# EAGLE board PCB panel M1 (2016-04-06) (EAGLE 6.1), part 1 of 5
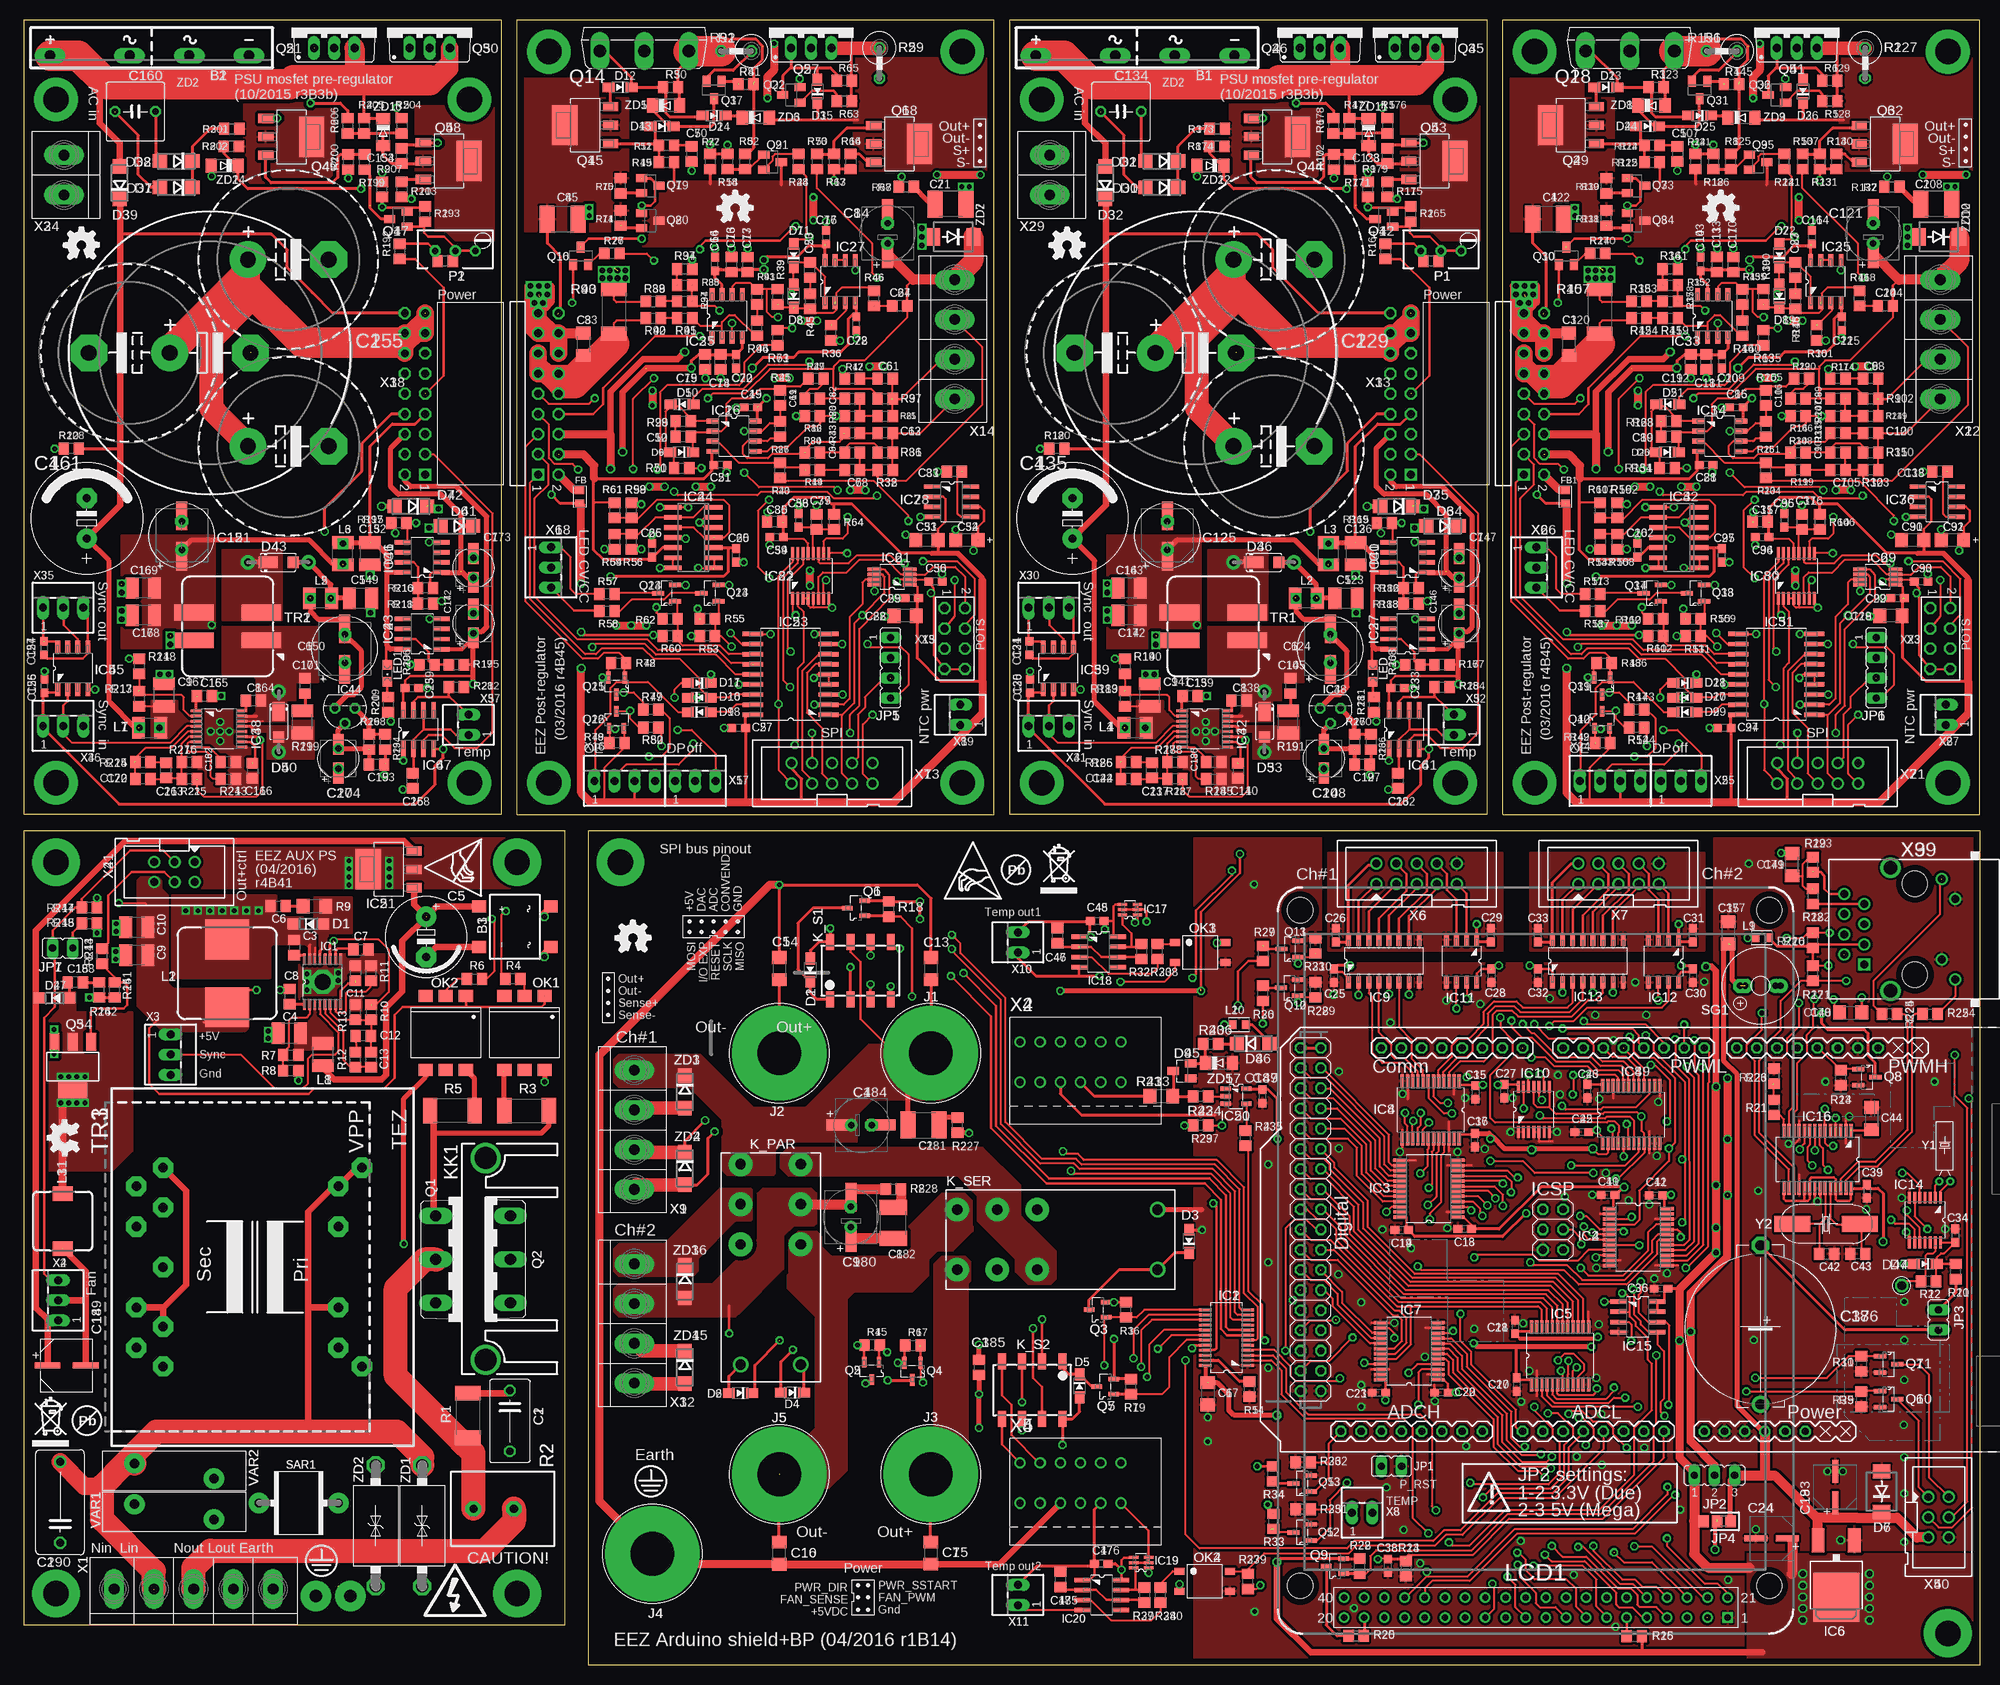
[diagram p0: board, top side]
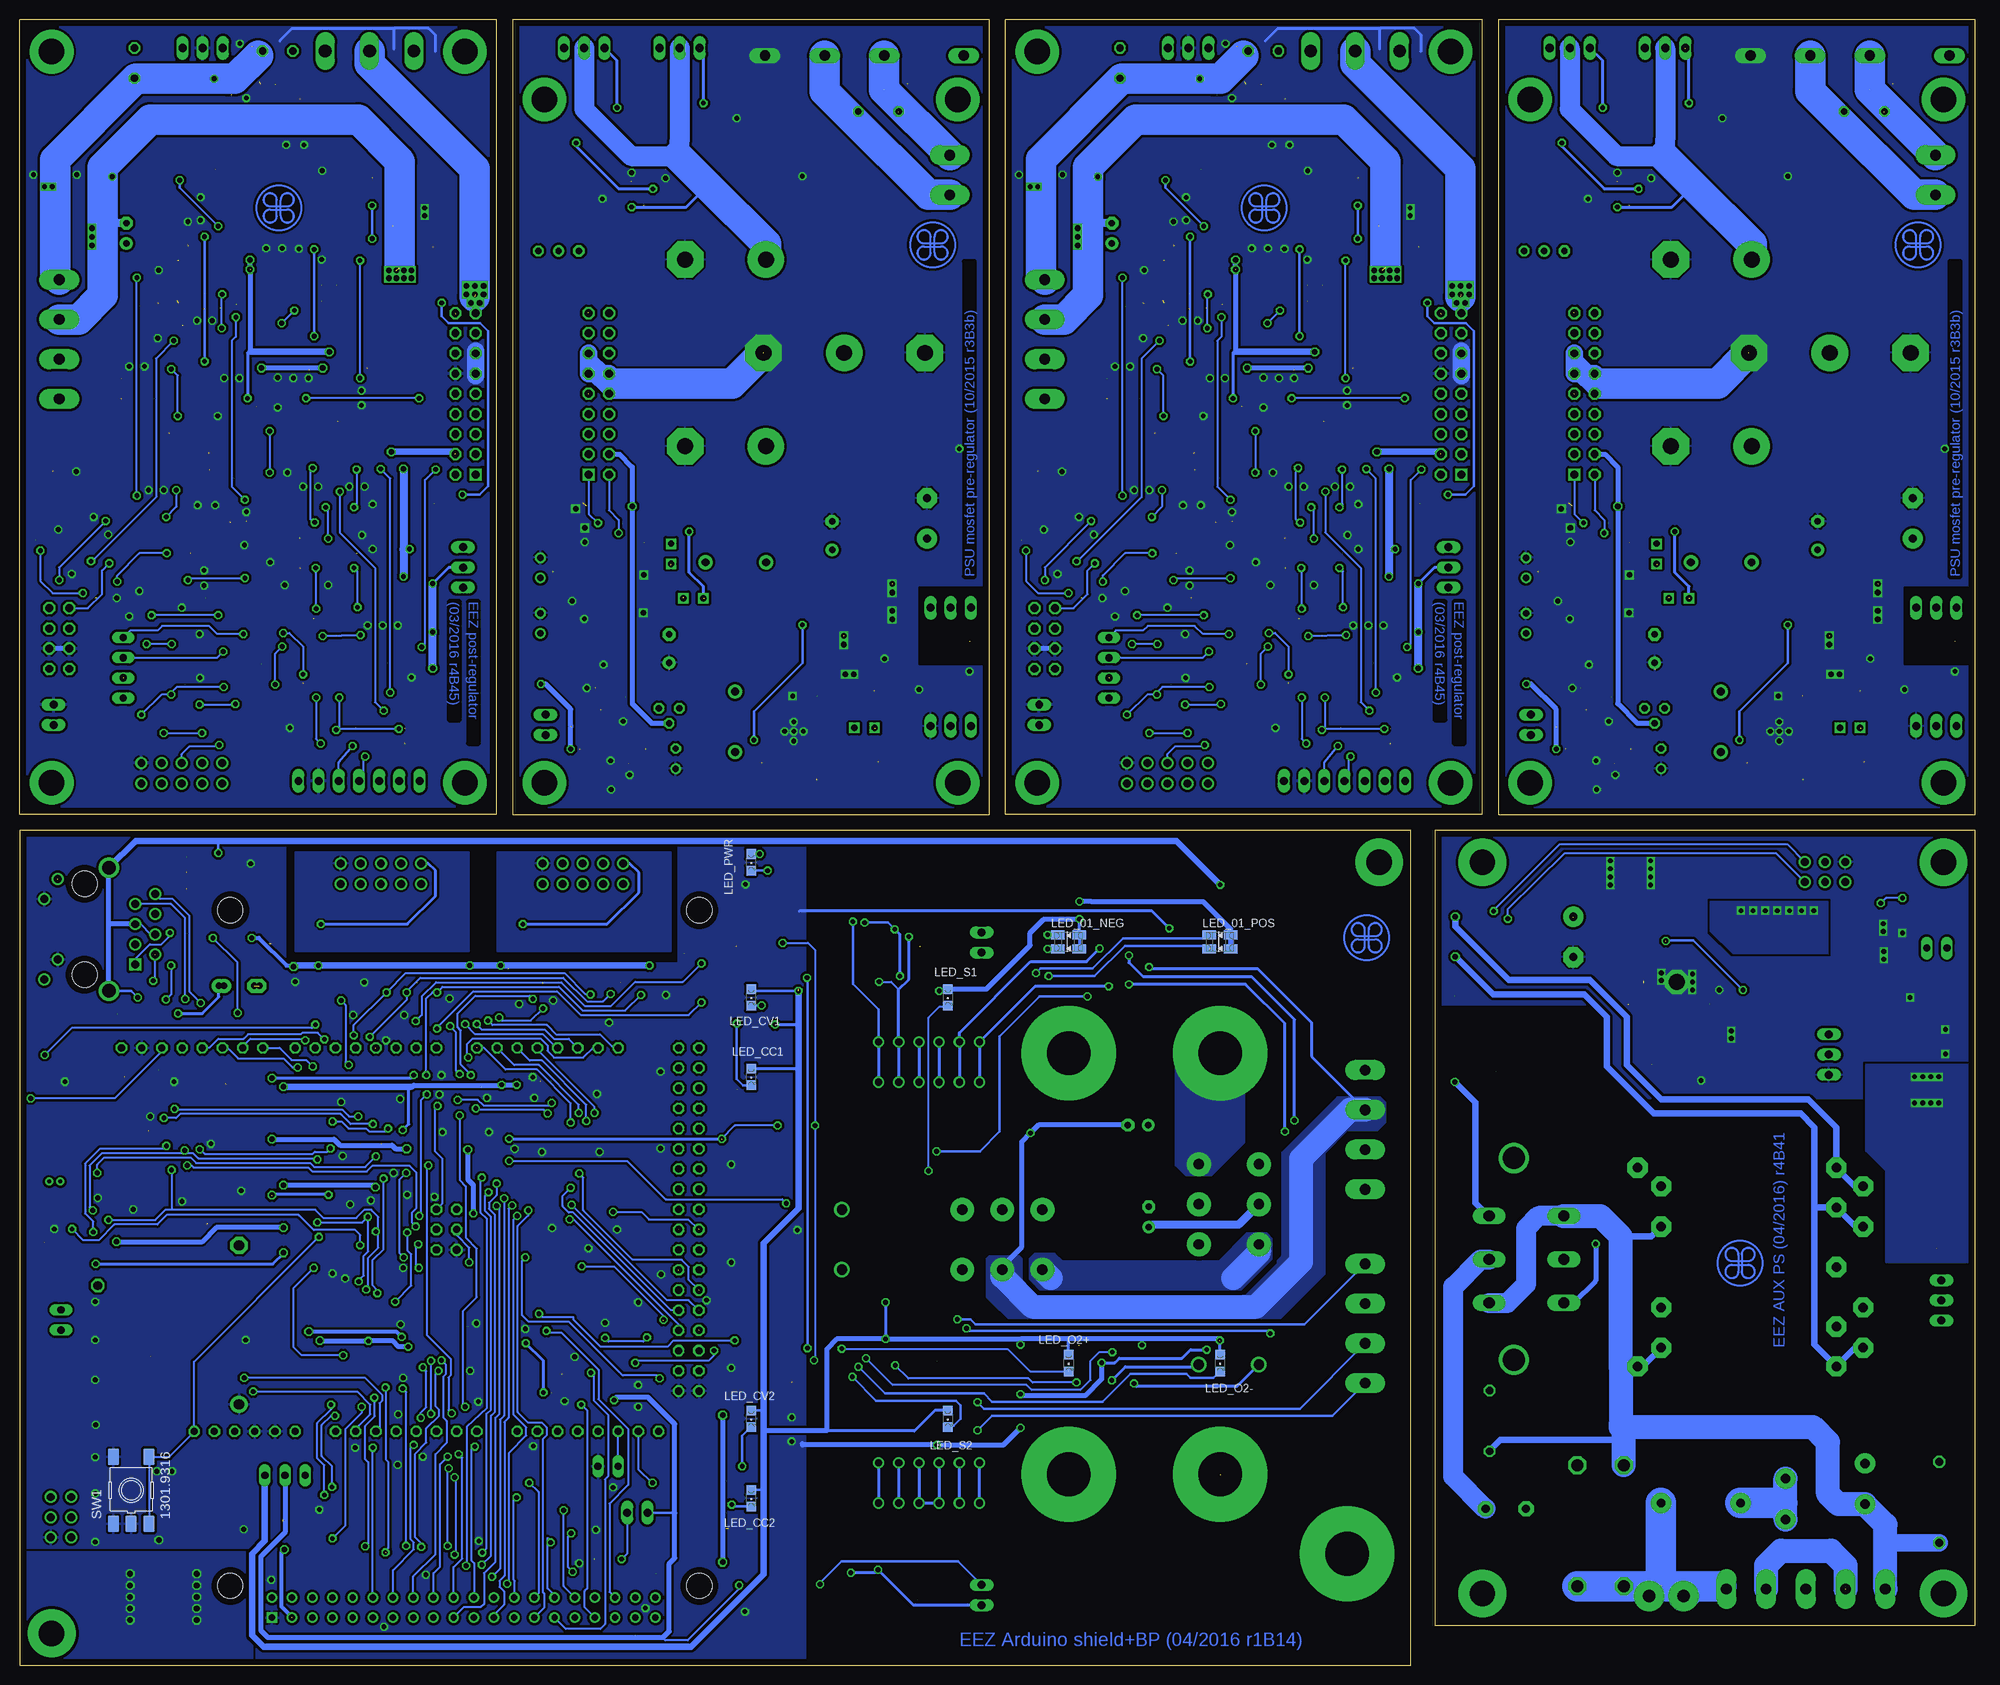
[diagram p1: board, bottom side, seen from below]

Size 246 x 207 mm. Coordinates in mm from the lower left corner, seen from the top.
Outline: 124,207 184,207 184,107 124,107 124,207
Outline: 0,207 60,207 60,107 0,107 0,207
Outline: 122,107 122,207 62,207 62,107 122,107
Outline: 246,107 246,207 186,207 186,107 246,107
Outline: 71,0 71,105 246,105 246,0 71,0
Outline: 0,5 0,105 68,105 68,5 0,5
Copper layers (1+5*16): Top 0.035mm / dielectric 0.75mm / Route5 0.035mm / dielectric 0.75mm / Bottom 0.035mm
Design rules: minimum track width 10mil, minimum drill 0.5mm, track to track 8mil, track to pad 8mil, pad to pad 8mil, via to via 8mil, smd to smd 8mil, copper to edge 30mil, drill to drill 8mil, minimum pad ring 10mil, minimum via ring 8mil, stop-mask expansion 0mil, vias tented up to drill 25mil, thermal gap 10mil
Net classes: 0 default: width 0.254 mm, drill 0.584 mm, clearance 0.254 mm; 1 power: width 0.254 mm, drill 0.584 mm, clearance 0.254 mm; 2 gnd: width 0.254 mm, drill 0.584 mm, clearance 0.254 mm; 3 isolators: width 0.254 mm, drill 0.584 mm, clearance 0.254 mm
tKeepout: 8 lines

## Footprints (pad centres in the part's own frame; a part is rotated, then mirrored left to right if it is on the bottom)
GBI20 = drill 1.3 long: + -12.75,-3.5; - 12.25,-3.5; AC1 -2.75,-3.5; AC2 4.75,-3.5
DFS = smd 1.5 x 1.7: + -2.55,-4.5; - 2.55,-4.5; AC1 -2.55,4.5; AC2 2.55,4.5
C0805 = smd 1.3 x 1.5: 1 -0.95,0; 2 0.95,0
C075-052X106 = drill 0.914 octagon: 1 -3.81,0; 2 3.81,0
C1210 = smd 1.6 x 2.7: 1 -1.4,0; 2 1.4,0
ECAP5/10.5 = drill 1.016 pad 2.54: + -2.54,0 | drill 1.016 pad 2.54 octagon: - 2.54,0
C1206 = smd 1.6 x 1.8: 1 -1.4,0; 2 1.4,0
C0603 = smd 1.1 x 1: 1 -0.85,0; 2 0.85,0
PANASONIC_C = smd 2.87 x 0.762: 1 -1.981,0; 2 1.981,0
EC1206 = smd 1.6 x 1.8: + -1.4,0; - 1.4,0
C1812 = smd 1.9 x 3.4: 1 -1.95,0; 2 1.95,0
CAPAE660X610N_COMBO2 = smd 3.6 x 1.4: 1 -2.6,0; 2 2.5,0 | drill 0.813 pad 1.6: 1.1 -1.27,0 | drill 0.813 pad 1.6 octagon: 2.1 1.27,0
CAPAE660X610N_COMBO = smd 3.6 x 1.4: 1 -2.6,0; 2 2.5,0 | drill 0.813 pad 1.6: 1.1 -1.778,0 | drill 0.813 pad 1.6 octagon: 2.1 1.778,0
ED35D+3XED22.5_COMBO = drill 2.007 pad 4.597: + -5.08,0; +2 4.763,11.748; +3 4.763,-11.748 | drill 2.007 pad 4.597 octagon: - 5.08,0; -1 -15.24,0; -2 14.922,11.748; -3 14.922,-11.748
C050-075X075 = drill 0.813 octagon: 1 -2.54,0; 2 2.54,0
ECAP5/13 = drill 1.016 pad 2.54: + -2.54,0 | drill 1.016 pad 2.54 octagon: - 2.54,0
CAPAE430X610N_COMBO = smd 2.6 x 1.3: 1 -1.8,0; 2 1.8,0 | drill 0.8: 1.1 -1.27,0 | drill 0.8 octagon: 2.1 1.27,0
SG-R20MM = drill 1.3 pad 2.184 octagon: 1 10.389,0 | drill 1.3 pad 2.184: 2 -9.601,0
CAPAE660X610N = smd 3.251 x 0.762: 1 -2.413,0; 2 2.413,0
C102-064X133 = drill 1.016 octagon: 1 -5.08,0; 2 5.08,0
SOD123 = smd 1.4 x 1.4: A 1.9,0; C -1.9,0
SOD323-W = smd 1.5 x 1.2: A 1.45,0; C -1.45,0
DO214AA = smd 1.8 x 2.2: A 2.55,0; C -2.55,0
DO214AC = smd 1.8 x 1.7: A 2.05,0; C -2.05,0
DO34+SOD123 = drill 1 pad 1.778: A 3.81,0; C -3.81,0 | smd 1.4 x 1.4: A.1 1.9,0 | smd 2.4 x 1.5: C.1 -1.27,0
SOT23 = smd 1 x 1.4: 1 -0.95,-1.1; 2 0.95,-1.1; 3 0,1.1
BEAD0603 = smd 1 x 1.1: P$1 -0.85,0; P$2 0.85,0
SOP65P640X110-17N_HOLE = smd 1.422 x 0.356: 1 -2.845,2.286; 2 -2.845,1.626; 3 -2.845,0.965; 4 -2.845,0.33; 5 -2.845,-0.33; 6 -2.845,-0.965; 7 -2.845,-1.626; 8 -2.845,-2.286; 9 2.845,-2.286; 10 2.845,-1.626; 11 2.845,-0.965; 12 2.845,-0.33; 13 2.845,0.33; 14 2.845,0.965; 15 2.845,1.626; 16 2.845,2.286 | smd 2.032 x 2.032: TP 0,0 | drill 2 octagon: TP2 0,0
SOP63P600X175-24N = smd 1.6 x 0.356: 1 -2.667,3.505; 2 -2.667,2.845; 3 -2.667,2.235; 4 -2.667,1.575; 5 -2.667,0.965; 6 -2.667,0.305; 7 -2.667,-0.305; 8 -2.667,-0.965; 9 -2.667,-1.575; 10 -2.667,-2.235; 11 -2.667,-2.845; 12 -2.667,-3.505; 13 2.667,-3.505; 14 2.667,-2.845; 15 2.667,-2.235; 16 2.667,-1.575; 17 2.667,-0.965; 18 2.667,-0.305; 19 2.667,0.305; 20 2.667,0.965; 21 2.667,1.575; 22 2.667,2.235; 23 2.667,2.845; 24 2.667,3.505
SOP65P780X200-24N = smd 1.651 x 0.432: 1 -3.632,3.581; 2 -3.632,2.921; 3 -3.632,2.286; 4 -3.632,1.626; 5 -3.632,0.965; 6 -3.632,0.33; 7 -3.632,-0.33; 8 -3.632,-0.965; 9 -3.632,-1.626; 10 -3.632,-2.286; 11 -3.632,-2.921; 12 -3.632,-3.581; 13 3.632,-3.581; 14 3.632,-2.921; 15 3.632,-2.286; 16 3.632,-1.626; 17 3.632,-0.965; 18 3.632,-0.33; 19 3.632,0.33; 20 3.632,0.965; 21 3.632,1.626; 22 3.632,2.286; 23 3.632,2.921; 24 3.632,3.581
DPACK = smd 1.6 x 3: 1 -2.28,-4.8; 3 2.28,-4.8 | smd 5.8 x 6.2: 4 0,2.38
SOIC-16 = smd 1.549 x 0.61: 1 -2.692,4.445; 2 -2.692,3.175; 3 -2.692,1.905; 4 -2.692,0.635; 5 -2.692,-0.635; 6 -2.692,-1.905; 7 -2.692,-3.175; 8 -2.692,-4.445; 9 2.692,-4.445; 10 2.692,-3.175; 11 2.692,-1.905; 12 2.692,-0.635; 13 2.692,0.635; 14 2.692,1.905; 15 2.692,3.175; 16 2.692,4.445
SOP65P640X120-14N = smd 1.473 x 0.356: 1 -2.819,1.956; 2 -2.819,1.295; 3 -2.819,0.66; 4 -2.819,0; 5 -2.819,-0.66; 6 -2.819,-1.295; 7 -2.819,-1.956; 8 2.819,-1.956; 9 2.819,-1.295; 10 2.819,-0.66; 11 2.819,0; 12 2.819,0.66; 13 2.819,1.295; 14 2.819,1.956
SOIC127P600X173-8N = smd 1.55 x 0.6: 1 -2.7,1.9; 2 -2.7,0.63; 3 -2.7,-0.64; 4 -2.7,-1.91; 5 2.7,-1.91; 6 2.7,-0.64; 7 2.7,0.63; 8 2.7,1.9
SOIC127P600X175-8N = smd 1.981 x 0.559: 1 -2.464,1.905; 2 -2.464,0.635; 3 -2.464,-0.635; 4 -2.464,-1.905; 5 2.464,-1.905; 6 2.464,-0.635; 7 2.464,0.635; 8 2.464,1.905
SOP65P780X200-28N = smd 1.651 x 0.432: 1 -3.632,4.216; 2 -3.632,3.581; 3 -3.632,2.921; 4 -3.632,2.286; 5 -3.632,1.626; 6 -3.632,0.965; 7 -3.632,0.33; 8 -3.632,-0.33; 9 -3.632,-0.965; 10 -3.632,-1.626; 11 -3.632,-2.286; 12 -3.632,-2.921; 13 -3.632,-3.581; 14 -3.632,-4.216; 15 3.632,-4.216; 16 3.632,-3.581; 17 3.632,-2.921; 18 3.632,-2.286; 19 3.632,-1.626; 20 3.632,-0.965; 21 3.632,-0.33; 22 3.632,0.33; 23 3.632,0.965; 24 3.632,1.626; 25 3.632,2.286; 26 3.632,2.921; 27 3.632,3.581; 28 3.632,4.216
SOT65P210X110-6N = smd 1.168 x 0.356: 1 -0.94,0.66; 2 -0.94,0; 3 -0.94,-0.66; 4 0.94,-0.66; 5 0.94,0; 6 0.94,0.66
DGK8-M = smd 1.727 x 0.483: 1 -2.235,0.965; 2 -2.235,0.33; 3 -2.235,-0.33; 4 -2.235,-0.965; 5 2.235,-0.965; 6 2.235,-0.33; 7 2.235,0.33; 8 2.235,0.965
PW(R-PDSO-G16) = smd 1.6 x 0.35: 1 -2.8,2.3; 2 -2.8,1.65; 3 -2.8,1; 4 -2.8,0.35; 5 -2.8,-0.3; 6 -2.8,-0.95; 7 -2.8,-1.6; 8 -2.8,-2.25; 9 2.8,-2.25; 10 2.8,-1.6; 11 2.8,-0.95; 12 2.8,-0.3; 13 2.8,0.35; 14 2.8,1; 15 2.8,1.65; 16 2.8,2.3
SOIC127P1030X265-18N = smd 2.54 x 0.559: 1 -4.775,5.08; 2 -4.775,3.81; 3 -4.775,2.54; 4 -4.775,1.27; 5 -4.775,0; 6 -4.775,-1.27; 7 -4.775,-2.54; 8 -4.775,-3.81; 9 -4.775,-5.08; 10 4.775,-5.08; 11 4.775,-3.81; 12 4.775,-2.54; 13 4.775,-1.27; 14 4.775,0; 15 4.775,1.27; 16 4.775,2.54; 17 4.775,3.81; 18 4.775,5.08
SO14 = smd 0.6 x 2.2: 1 -3.81,-2.6; 2 -2.54,-2.6; 3 -1.27,-2.6; 4 0,-2.6; 5 1.27,-2.6; 6 2.54,-2.6; 7 3.81,-2.6; 8 3.81,2.6; 9 2.54,2.6; 10 1.27,2.6; 11 0,2.6; 12 -1.27,2.6; 13 -2.54,2.6; 14 -3.81,2.6
TO92 = drill 0.813 octagon: 1 -1.27,0; 2 0,1.905; 3 1.27,0
SOP65P640X110-16N = smd 1.422 x 0.356: 1 -2.845,2.286; 2 -2.845,1.626; 3 -2.845,0.965; 4 -2.845,0.33; 5 -2.845,-0.33; 6 -2.845,-0.965; 7 -2.845,-1.626; 8 -2.845,-2.286; 9 2.845,-2.286; 10 2.845,-1.626; 11 2.845,-0.965; 12 2.845,-0.33; 13 2.845,0.33; 14 2.845,0.965; 15 2.845,1.626; 16 2.845,2.286
SOT95P280X145-5N = smd 1.27 x 0.559: 1 -1.295,0.94; 2 -1.295,0; 3 -1.295,-0.94; 4 1.295,-0.94; 5 1.295,0.94
SOT230P700X180-4N = smd 1.905 x 1.143: 1 -3.2,2.311; 2 -3.2,0; 3 -3.2,-2.311 | smd 3.175 x 5.08: 4 2.565,0
BP_5_12 = drill 5.5 pad 11.9: P$1 0,0
JP1 = drill 0.914 long: 1 0,-1.27; 2 0,1.27
JUMPER_3-PIN = drill 0.914 long: 1 -2.54,0; 2 0,0; 3 2.54,0
A0R-JMP = smd 1.5 x 1.3: 1 0,1.7; 2 0,0; 3 0,-1.7
JP4 = drill 0.914 long: 1 -3.81,0; 2 -1.27,0; 3 1.27,0; 4 3.81,0
RT-C/016A5_ROUND = drill 1.3 pad 3: 11A 8.83,3.78; 11B 8.83,-3.78; 12A 3.79,3.78; 12B 3.79,-3.78; 14A 13.87,3.78; 14B 13.87,-3.78 | drill 1.3: A1 -11.33,-3.78; A2 -11.33,3.78
G6K-2F = smd 1 x 2: 1 -3.81,-3.6; 2 -1.27,-3.6; 3 1.27,-3.6; 4 3.81,-3.6; 5 3.81,3.6; 6 1.27,3.6; 7 -1.27,3.6; 8 -3.81,3.6
SK145 = drill 2.8: 1 -12.7,0; 2 12.7,0
MSS1278 = smd 5.5 x 5: 1 0,4.25; 2 0,-4.25
L1210_COMBO = smd 1.6 x 2.7: 1 -1.4,0; 2 1.4,0 | drill 0.8 square: 1.1 -1.27,0; 2.1 1.27,0
L1210 = smd 1.6 x 2.7: 1 -1.4,0; 2 1.4,0
DE0704 = smd 2.5 x 1.8: 1 0,3.45; 2 0,-3.45
LCD_TFT_320QVT_MIRROR = drill 0.8 square: 1 48.26,0 | drill 0.8: 2 45.72,0; 3 43.18,0; 4 40.64,0; 5 38.1,0; 6 35.56,0; 7 33.02,0; 8 30.48,0; 9 27.94,0; 10 25.4,0; 11 22.86,0; 12 20.32,0; 13 17.78,0; 14 15.24,0; 15 12.7,0; 16 10.16,0; 17 7.62,0; 18 5.08,0; 19 2.54,0; 20 0,0; 21 48.26,2.54; 22 45.72,2.54; 23 43.18,2.54; 24 40.64,2.54; 25 38.1,2.54; 26 35.56,2.54; 27 33.02,2.54; 28 30.48,2.54; 29 27.94,2.54; 30 25.4,2.54; 31 22.86,2.54; 32 20.32,2.54; 33 17.78,2.54; 34 15.24,2.54; 35 12.7,2.54; 36 10.16,2.54; 37 7.62,2.54; 38 5.08,2.54; 39 2.54,2.54; 40 0,2.54 | hole 3.2: -5.5,4; 53.5,4; -5.5,89; 53.5,89
CHIPLED_0805 = smd 1.2 x 1.2: A 0,-1.05; C 0,1.05
LED_KPB-3025 = smd 1.7 x 1.15: 1 1.35,0.875; 2 -1.35,0.875; 3 1.35,-0.875; 4 -1.35,-0.875
ARDUINO+ICSP_MIRROR = drill 0.9 octagon: 0 63.5,2.54; 1 60.96,2.54; 2 58.42,2.54; 3 55.88,2.54; 3.3V 35.56,50.8; 4 53.34,2.54; 5 50.8,2.54; 5V 38.1,50.8; 5V(1) 93.98,2.54; 5V(2) 96.52,2.54; 6 48.26,2.54; 7 45.72,2.54; 8 41.656,2.54; 9 39.116,2.54; 10 36.576,2.54; 11 34.036,2.54; 12 31.496,2.54; 13 28.956,2.54; 14 68.58,2.54; 15 71.12,2.54; 16 73.66,2.54; 17 76.2,2.54; 18 78.74,2.54; 19 81.28,2.54; 20 83.82,2.54; 21 86.36,2.54; 22 93.98,5.08; 23 96.52,5.08; 24 93.98,7.62; 25 96.52,7.62; 26 93.98,10.16; 27 96.52,10.16; 28 93.98,12.7; 29 96.52,12.7; 30 93.98,15.24; 31 96.52,15.24; 32 93.98,17.78; 33 96.52,17.78; 34 93.98,20.32; 35 96.52,20.32; 36 93.98,22.86; 37 96.52,22.86; 38 93.98,25.4; 39 96.52,25.4; 40 93.98,27.94; 41 96.52,27.94; 42 93.98,30.48; 43 96.52,30.48; 44 93.98,33.02; 45 96.52,33.02; 46 93.98,35.56; 47 96.52,35.56; 48 93.98,38.1; 49 96.52,38.1; 50 93.98,40.64; 51 96.52,40.64; 52 93.98,43.18; 53 96.52,43.18; A0 50.8,50.8; A1 53.34,50.8; A2 55.88,50.8; A3 58.42,50.8; A4 60.96,50.8; A5 63.5,50.8; A6 66.04,50.8; A7 68.58,50.8; A8 73.66,50.8; A9 76.2,50.8; A10 78.74,50.8; A11 81.28,50.8; A12 83.82,50.8; A13 86.36,50.8; A14 88.9,50.8; A15 91.44,50.8; AREF 23.876,2.54; GND 26.416,2.54; GND1 40.64,50.8; GND2 43.18,50.8; GND3 93.98,45.72; GND4 96.52,45.72; ICSP_+5V 66.04,22.86; ICSP_MISO 63.5,22.86; ICSP_MOSI 66.04,25.4; ICSP_RESET 63.5,27.94; ICSP_SCK 63.5,25.4; RESET 33.02,50.8; VIN 45.72,50.8 | drill 1.016 octagon: ICSP_GND 66.04,27.94
DIL6-SMD = smd 1.78 x 1.52: 1 -2.54,-4.645; 2 0,-4.645; 3 2.54,-4.645; 4 2.54,4.645; 5 0,4.645; 6 -2.54,4.645
HCPL-181 = smd 0.889 x 1.27: 1 -1.27,-3.175; 2 1.27,-3.175; 3 1.27,3.175; 4 -1.27,3.175
R_TRIM+R0805 = smd 1.3 x 1.5: 1 0.32,1.27; 2 2.22,1.27 | drill 0.813 octagon: A -2.54,0 | drill 0.8 pad 1.422 octagon: E 2.54,0 | drill 0.8 pad 1.422: S 0,0
TOP3S-1 = drill 1.397 long: A1 -5.461,-3.175; A2 0,-3.175; G 5.461,-3.175
SOT95P237X112-3N = smd 1.321 x 0.559: 1 -1.092,0.94; 2 -1.092,-0.94; 3 1.092,0
SOT103P240X110-3N = smd 1.524 x 0.559: 1 -1.079,1.016; 2 -1.079,-1.016; 3 1.079,0
TO247BV = drill 1.6 long: D 0,-2.921; G -5.588,-2.921; S 5.588,-2.921
SOT23-BEC = smd 1 x 1.4: B -0.95,-1.1; C 0,1.1; E 0.95,-1.1
TO220B-VMOS = drill 1.016 long: D 0,-2.54; G -2.54,-2.54; S 2.54,-2.54
SOT223 = smd 1.219 x 2.235: 1 -2.311,-3.099; 2 0,-3.099; 3 2.311,-3.099 | smd 3.6 x 2.2: 4 0,3.099
R2512 = smd 1.8 x 3.2: 1 -2.8,0; 2 2.8,0
R_0913 = drill 1.016 pad 1.93 octagon: 1 -3.556,0; 2 1.524,0
R0805 = smd 1.3 x 1.5: 1 -0.95,0; 2 0.95,0
R1206 = smd 1.6 x 1.803: 1 -1.422,0; 2 1.422,0
0411V = drill 0.914 octagon: 1 -2.54,0; 2 1.27,0
R1210 = smd 1.6 x 2.7: 1 -1.4,0; 2 1.4,0
SAR = drill 1.1 pad 2.54: P$1 0,0; P$2 10,0
BUZZER = drill 0.8 pad 1.778 octagon: + 1.905,0; +B 2.54,0 | drill 0.8 pad 1.778: - -1.905,0; -B -2.54,0
SHORT = drill 0.6 octagon: 1 0,0; 2 0,0
SHORT_2 = drill 1.1 octagon: 1 0,0 | drill 1.1 pad 1.778 octagon: 2 0,0
TACTM-6XN = smd 2.1 x 1.4: 1 -4.2,2.25; 2 4.2,2.25; 3 -4.2,-2.25; 4 4.2,-2.25; 5 -4.2,0
PCB_SHIELD_TAB = drill 1.1 octagon: 1 0,0
MSD1260 = smd 2 x 5: 1 1.75,4.25; 2 -1.75,4.25; 3 -1.75,-4.25; 4 1.75,-4.25
PCB_TRAFO6VA_TEZ+VPP = drill 1.2 pad 2.54 octagon: NC -12.5,0; P1.1V 9.525,10.16; P1.2V 9.525,5.08; P1_TEZ 12.5,12.5; P2.1V 9.525,-5.08; P2.2V 9.525,-10.16; P2_TEZ 12.5,-12.5; S1.1T -12.5,12.5; S1.1V -15.875,10.16; S1.2T -12.5,7.5; S1.2V -15.875,5.08; S2.1T -12.5,-7.5; S2.1V -15.875,-5.08; S2.2T -12.5,-12.5; S2.2V -15.875,-10.16
VARISTOR = drill 1.2 pad 2.54: P$1 -5,0.95; P$2 5,-0.95
TBLOCK5.0_5 = drill 1.35 pad 2.54 long: 1 0,0; 2 0,-5; 3 0,-10; 4 0,-15; 5 0,-20
22-23-2031 = drill 1 long: 1 -2.54,0; 2 0,0; 3 2.54,0
MC000005_MIRROR = drill 0.9: 1 0,0; 1.1 0,-5.08; 2 -2.54,0; 2.1 -2.54,-5.08; 3 -5.08,0; 3.1 -5.08,-5.08; 4 -7.62,0; 4.1 -7.62,-5.08; 5 -10.16,0; 5.1 -10.16,-5.08; 6 -12.7,0; 6.1 -12.7,-5.08
IDC-10PIN = drill 1 pad 1.422: 1 -5.08,-1.27; 2 -5.08,1.27; 3 -2.54,-1.27; 4 -2.54,1.27; 5 0,-1.27; 6 0,1.27; 7 2.54,-1.27; 8 2.54,1.27; 9 5.08,-1.27; 10 5.08,1.27
22-23-2021 = drill 1 long: 1 -1.27,0; 2 1.27,0
TBLOCK5.0_4 = drill 1.35 pad 2.54 long: P$1 0,0; P$2 0,-5; P$3 0,-10; P$4 0,-15
PAK100/2500-10 = drill 1 pad 1.422: 1 -5.08,-1.27; 2 -5.08,1.27; 3 -2.54,-1.27; 4 -2.54,1.27; 5 0,-1.27; 6 0,1.27; 7 2.54,-1.27; 8 2.54,1.27; 9 5.08,-1.27; 10 5.08,1.27
TSW-104-02-S-D = drill 1 pad 1.5 octagon: 1 -3.81,-1.27; 2 -3.81,1.27; 3 -1.27,-1.27; 4 -1.27,1.27; 5 1.27,-1.27; 6 1.27,1.27; 7 3.81,-1.27; 8 3.81,1.27
22-23-2041 = drill 1 long: 1 -3.81,0; 2 -1.27,0; 3 1.27,0; 4 3.81,0
TSW-109-08-L-D-RA = drill 1 pad 1.5 square: 1 10.16,1.524 | drill 1 pad 1.5 octagon: 2 10.16,4.064; 3 7.62,1.524; 4 7.62,4.064; 5 5.08,1.524; 6 5.08,4.064; 7 2.54,1.524; 8 2.54,4.064; 9 0,1.524; 10 0,4.064; 11 -2.54,1.524; 12 -2.54,4.064; 13 -5.08,1.524; 14 -5.08,4.064; 15 -7.62,1.524; 16 -7.62,4.064; 17 -10.16,1.524; 18 -10.16,4.064
TBLOCK5.0_2 = drill 1.35 pad 2.54 long: 1 0,0; 2 0,-5
SSW-109-02-T-D-RA = drill 1 pad 1.5 square: 1 20.32,2.54 | drill 1 pad 1.5 octagon: 2 20.32,0; 3 17.78,2.54; 4 17.78,0; 5 15.24,2.54; 6 15.24,0; 7 12.7,2.54; 8 12.7,0; 9 10.16,2.54; 10 10.16,0; 11 7.62,2.54; 12 7.62,0; 13 5.08,2.54; 14 5.08,0; 15 2.54,2.54; 16 2.54,0; 17 0,2.54; 18 0,0
RJ45-TRAFO-LED = drill 1 square: 1 -4.445,6.35 | drill 1: 2 -3.175,8.89; 3 -1.905,6.35; 4 -0.635,8.89; 5 0.635,6.35; 6 1.905,8.89; 7 3.175,6.35; 8 4.445,8.89; 9 -6.325,-5.08; 10 -3.785,-3.38; 11 3.785,-5.08; 12 6.325,-3.38 | drill 1.7: SH1 -7.75,3.05; SH2 7.75,3.05 | hole 3.2: -5.715,0; 5.715,0
IDC-6PIN = drill 1 pad 1.422: 1 -2.54,-1.27; 2 -2.54,1.27; 3 0,-1.27; 4 0,1.27; 5 2.54,-1.27; 6 2.54,1.27
R26_XTAL = drill 0.5: 1 -0.7,0; 2 0.7,0
HC-49/4H = smd 4.5 x 2: 1 -4.25,0; 2 4.25,0
DO201-BIDIR = drill 1.499 octagon: A 7.62,0; C -7.62,0
MINIMELF = smd 1.4 x 1.8: A 1.7,0; C -1.7,0

## Placement (x,y rotation side)
B1  GBI20D  [GBI20]  140,206 0 top
B2  GBI20D  [GBI20]  16,206 0 top
B3  DF01S  [DFS]  61.72,92.88 270 top
C1  180p  [C0805]  43.62,76.18 270 top
C2  47n/400V  [C075-052X106]  61.09,30.72 270 top
C3  22n  [C0805]  33.97,90.28 270 top
C4  4u7  [C1210]  33.34,79.49 180 top
C5  1mF/25V  [ECAP5/10.5]  50.57,91.62 270 top
C6  330p  [C0805]  31.94,95.49 0 top
C7  22n  [C0805]  42.35,90.03 0 top
C8  100n  [C0805]  33.4,84.12 270 top
C9  4u7  [C1210]  14.16,89.33 180 top
C10  4u7  [C1210]  14.16,92.82 180 top
C11  820p  [C0805]  41.66,87.04 270 top
C12  3n9  [C0805]  42.65,79.17 180 top
C13  10n  [C1206]  114.08,87.63 90 top
C14  10n  [C1206]  94.97,87.63 270 top
C15  10n  [C1206]  114.03,14.1 270 top
C16  10n  [C1206]  94.97,14.1 90 top
C17  10u  [C1206]  148.89,34.16 270 top
C18  100n  [C0603]  181.21,54.86 180 top
C19  100n  [C0603]  173.27,54.74 0 top
C20  100n  [C0603]  187.75,35.31 270 top
C21  100n  [C0603]  187.56,42.55 270 top
C22  100n  [C0603]  178.29,34.29 180 top
C23  100n  [C0603]  170.41,34.29 0 top
C24  10u  [PANASONIC_C]  219.82,15.94 180 top
C25  100n  [C0603]  164.76,86.74 270 top
C26  100n  [C0603]  165.01,91.82 90 top
C27  100n  [C0603]  186.22,72.2 90 top
C28  100n  [C0603]  184.57,86.74 270 top
C29  100n  [C0603]  184.51,91.82 90 top
C30  100n  [C0603]  209.91,86.74 270 top
C31  100n  [C0603]  209.91,91.82 90 top
C32  100n  [C0603]  190.41,86.74 270 top
C33  100n  [C0603]  190.41,91.82 90 top
C34  100n  [C0603]  242.93,54.04 270 top
C35  100n  [C0603]  182.54,72.06 270 top
C36  100n  [C0603]  205.91,47.37 180 top
C37  100n  [C0603]  182.48,66.05 90 top
C38  100n  [C0603]  171.56,12.51 90 top
C39  100n  [C0603]  231.82,59.63 270 top
C40  100n  [C0603]  199.24,59.18 180 top
C41  100n  [C0603]  205.27,59.12 0 top
C42  18p  [C0805]  226.74,51.75 0 top
C43  18p  [C0805]  230.67,51.75 180 top
C44  10u  [C1206]  232.39,68.77 270 top
C45  100n  [C0603]  195.94,67.06 180 top
C46  100n  [C0603]  196.64,72.2 90 top
C47  47n  [C0805]  129.96,91.76 270 top
C48  100n  [C0603]  134.98,93.6 180 top
C49  100n  [C0603]  91.4,158.24 0 top
C50  1n  [C0805]  98.83,175.52 90 top
C51  100n  [C0603]  87.59,151.01 180 top
C52  120p  [C0805]  82.89,154.56 180 top
C53  10u  [C1206]  113.56,141.54 180 top
C54  10u (Tant.)  [EC1206]  118.58,141.54 180 top
C55  100n  [C0603]  111.66,134.24 0 top
C56  100n  [C0603]  114.64,136.34 180 top
C57  100n  [C0603]  89.88,117.92 180 top
C58  100n  [C0603]  97.43,144.02 270 top
C59  100n  [C0603]  94.64,141.93 0 top
C60  100n  [C0603]  89.56,139.64 90 top
C61  47p  [C0805]  108.29,161.86 180 top
C62  2n2  [C0805]  104.16,159.33 180 top
C63  47p  [C0805]  108.29,155.02 180 top
C64  2n2  [C0805]  104.16,152.53 0 top
C65  100n  [C0603]  78.95,140.27 270 top
C66  100n  [C0603]  86.89,176.28 90 top
C67  1n  [C0805]  110.13,171.01 180 top
C68  1n5  [C0805]  104.16,150.37 180 top
C69  1n5  [C0805]  99.15,159.32 180 top
C70  10n  [C0805]  83.97,190.12 270 top
C71  470n  [C1812]  116.55,183.84 180 top
C72  100n  [C0603]  89.56,164.02 270 top
C73  1u  [C0805]  91,176.2 270 top
C74  10n  [C0805]  87.59,163.96 90 top
C75  1u  [C0805]  85.64,163.96 90 top
C76  10n  [C0805]  88.96,176.22 270 top
C77  100n  [C0603]  100.86,179.64 270 top
C78  100n  [C0603]  104.67,168.79 90 top
C79  1u  [C0805]  99.66,143.83 270 top
C80  1u  [C0805]  94.38,143.89 0 top
C81  1u  [C0805]  116.99,150.18 180 top
C82  10u  [C1206]  110.83,132.02 180 top
C83  1u/100V  [C1206]  70.32,166.18 270 top
C84  22u/63V  [CAPAE660X610N_COMBO2]  108.61,180.15 90 top
C85  470n  [C1812]  67.72,181.93 0 top
C86  100n  [C0603]  215.4,158.24 0 top
C87  1n  [C0805]  222.83,175.52 90 top
C88  100n  [C0603]  211.59,151.01 180 top
C89  120p  [C0805]  206.89,154.56 180 top
C90  10u  [C1206]  237.56,141.54 180 top
C91  10u (Tant.)  [EC1206]  242.58,141.54 180 top
C92  100n  [C0603]  235.66,134.24 0 top
C93  100n  [C0603]  238.64,136.34 180 top
C94  100n  [C0603]  213.88,117.92 180 top
C95  100n  [C0603]  221.43,144.02 270 top
C96  100n  [C0603]  218.64,141.93 0 top
C97  100n  [C0603]  213.56,139.64 90 top
C98  47p  [C0805]  232.29,161.86 180 top
C99  2n2  [C0805]  228.16,159.33 180 top
C100  47p  [C0805]  232.29,155.02 180 top
C101  2n2  [C0805]  228.16,152.53 0 top
C102  100n  [C0603]  202.95,140.27 270 top
C103  100n  [C0603]  210.89,176.28 90 top
C104  1n  [C0805]  234.13,171.01 180 top
C105  1n5  [C0805]  228.16,150.37 180 top
C106  1n5  [C0805]  223.15,159.32 180 top
C107  10n  [C0805]  207.97,190.12 270 top
C108  470n  [C1812]  240.55,183.84 180 top
C109  100n  [C0603]  213.56,164.02 270 top
C110  1u  [C0805]  215,176.2 270 top
C111  10n  [C0805]  211.59,163.96 90 top
C112  1u  [C0805]  209.64,163.96 90 top
C113  10n  [C0805]  212.96,176.22 270 top
C114  100n  [C0603]  224.86,179.64 270 top
C115  100n  [C0603]  228.67,168.79 90 top
C116  1u  [C0805]  223.66,143.83 270 top
C117  1u  [C0805]  218.38,143.89 0 top
C118  1u  [C0805]  240.99,150.18 180 top
C119  10u  [C1206]  234.83,132.02 180 top
C120  1u/100V  [C1206]  194.32,166.18 270 top
C121  22u/63V  [CAPAE660X610N_COMBO2]  232.61,180.15 90 top
C122  470n  [C1812]  191.72,181.93 0 top
C123  2u2  [C1210]  166.29,134.24 0 top
C124  47u  [CAPAE660X610N_COMBO]  164.32,127.89 90 top
C125  47u  [CAPAE660X610N_COMBO]  143.81,142.12 90 top
C126  2u2  [C1210]  167.5,139.83 270 top
C127  100n  [C0805]  168.32,113.29 180 top
C128  560p  [C0805]  171.5,189.87 90 top
C129  10000u  [ED35D+3XED22.5_COMBO]  147.37,165.1 0 top
C130  100n  [C0603]  126.54,123.19 90 top
C131  100n  [C0603]  126.48,127.95 270 top
C132  22n  [C0805]  172.83,111.25 90 top
C133  100n  [C0603]  172.77,122.94 0 top
C134  1u  [C050-075X075]  137.97,195.46 0 top
C135  470u  [ECAP5/13]  131.87,144.29 90 top
C136  4n7  [C0805]  149.65,113.6 180 top
C137  6n8  [C0805]  141.84,112.59 90 top
C138  22n  [C0805]  152.83,121.35 180 top
C139  100n  [C0805]  146.67,121.92 180 top
C140  33n  [C0805]  152.7,112.52 270 top
C141  2u2/100V  [C1210]  141.59,122.05 90 top
C142  2u2  [C1210]  138.99,132.08 180 top
C143  2u2  [C1210]  138.99,135.51 180 top
C144  n.c.  [C0805]  138.92,111.51 180 top
C145  330p  [C0805]  159.31,123.19 270 top
C146  EEEFK1V100R  [CAPAE430X610N_COMBO]  180.51,131.07 90 top
C147  EEEFK1V100R  [CAPAE430X610N_COMBO]  180.51,138.05 90 top
C148  EEEFK1V220R  [CAPAE430X610N_COMBO]  163.5,114.05 90 top
C149  2u2  [C1210]  42.29,134.24 0 top
C150  47u  [CAPAE660X610N_COMBO]  40.32,127.89 90 top
C151  47u  [CAPAE660X610N_COMBO]  19.81,142.12 90 top
C152  2u2  [C1210]  43.5,139.83 270 top
C153  100n  [C0805]  44.32,113.29 180 top
C154  560p  [C0805]  47.5,189.87 90 top
C155  10000u  [ED35D+3XED22.5_COMBO]  23.37,165.1 0 top
C156  100n  [C0603]  2.54,123.19 90 top
C157  100n  [C0603]  2.48,127.95 270 top
C158  22n  [C0805]  48.83,111.25 90 top
C159  100n  [C0603]  48.77,122.94 0 top
C160  1u  [C050-075X075]  13.97,195.46 0 top
C161  470u  [ECAP5/13]  7.87,144.29 90 top
C162  4n7  [C0805]  25.65,113.6 180 top
C163  6n8  [C0805]  17.84,112.59 90 top
C164  22n  [C0805]  28.83,121.35 180 top
C165  100n  [C0805]  22.67,121.92 180 top
C166  33n  [C0805]  28.7,112.52 270 top
C167  2u2/100V  [C1210]  17.59,122.05 90 top
C168  2u2  [C1210]  14.99,132.08 180 top
C169  2u2  [C1210]  14.99,135.51 180 top
C170  n.c.  [C0805]  14.92,111.51 180 top
C171  330p  [C0805]  35.31,123.19 270 top
C172  EEEFK1V100R  [CAPAE430X610N_COMBO]  56.52,131.07 90 top
C173  EEEFK1V100R  [CAPAE430X610N_COMBO]  56.52,138.05 90 top
C174  EEEFK1V220R  [CAPAE430X610N_COMBO]  39.5,114.05 90 top
C175  47n  [C0805]  130.34,10.79 270 top
C176  100n  [C0603]  135.49,12.76 180 top
C177  10u  [C1206]  214.35,92.14 270 top
C178  10n  [C1206]  229.78,82.11 0 top
C179  10n  [C1206]  222.42,100.71 90 top
C180  22u/63V  [CAPAE660X610N_COMBO2]  103.99,56.39 90 top
C181  470n/100V  [C1812]  113.14,67.94 0 top
C182  470n/100V  [C1812]  109.33,55.63 90 top
C183  47u  [PANASONIC_C]  227.82,22.42 90 top
C184  22u/63V  [CAPAE660X610N_COMBO2]  105.33,67.94 0 top
C185  1u  [C0805]  120.12,37.47 270 top
C186  EECS5R5H105  [SG-R20MM]  218.42,42.42 90 top
C187  100n  [C0603]  155.74,71.56 270 top
C188  47n  [C0805]  6.41,85.9 180 top
C189  100u  [CAPAE660X610N]  5.33,37.7 0 top
C190  6n8 (X1)  [C102-064X133]  4.51,20.49 90 top
D1  DFLS1100-7  [SOD123]  35.75,93.27 0 top
D2  BAS316  [SOD323-W]  98.88,87.44 90 top
D3  BAS316  [SOD323-W]  146.54,53.34 90 top
D4  BAS316  [SOD323-W]  96.63,34.29 180 top
D5  BAS316  [SOD323-W]  132.76,35.12 270 top
D6  BAS316  [SOD323-W]  90.09,34.23 180 top
D7  SMBJ5.0A-TR  [DO214AA]  233.66,21.84 90 top
D8  BAS316  [SOD323-W]  96.8,172.21 90 top
D9  BAS316  [SOD323-W]  82.7,152.59 180 top
D10  BAS316  [SOD323-W]  82.76,158.63 0 top
D11  BAS316  [SOD323-W]  96.8,177.36 90 top
D12  BAS316  [SOD323-W]  74.95,198.5 180 top
D13  BAS316  [SOD323-W]  80.22,193.61 180 top
D14  BAS316  [SOD323-W]  86.77,194.95 180 top
D15  BAS316  [SOD323-W]  99.78,198 90 top
D16  BAS316  [SOD323-W]  84.92,121.73 0 top
D17  BAS316  [SOD323-W]  84.92,123.57 180 top
D18  BAS316  [SOD323-W]  84.92,119.89 0 top
D19  BAS316  [SOD323-W]  220.8,172.21 90 top
D20  BAS316  [SOD323-W]  206.7,152.59 180 top
D21  BAS316  [SOD323-W]  206.76,158.63 0 top
D22  BAS316  [SOD323-W]  220.8,177.36 90 top
D23  BAS316  [SOD323-W]  198.95,198.5 180 top
D24  BAS316  [SOD323-W]  204.22,193.61 180 top
D25  BAS316  [SOD323-W]  210.76,194.95 180 top
D26  BAS316  [SOD323-W]  223.78,198 90 top
D27  BAS316  [SOD323-W]  208.92,121.73 0 top
D28  BAS316  [SOD323-W]  208.92,123.57 180 top
D29  BAS316  [SOD323-W]  208.92,119.89 0 top
D30  S1G  [DO214AC]  143.11,185.93 180 top
D31  S1G  [DO214AC]  143.11,189.23 180 top
D32  S1G  [DO214AC]  136,186.5 90 top
D33  SR1100  [DO34+SOD123]  156,118.68 270 top
D34  SKL16  [DO214AC]  178.42,143.32 180 top
D35  SKL16  [DO214AC]  172.64,145.8 180 top
D36  SR1100  [DO34+SOD123]  155.94,138.75 0 top
D37  S1G  [DO214AC]  19.11,185.93 180 top
D38  S1G  [DO214AC]  19.11,189.23 180 top
D39  S1G  [DO214AC]  12,186.5 90 top
D40  SR1100  [DO34+SOD123]  32,118.68 270 top
D41  SKL16  [DO214AC]  54.42,143.32 180 top
D42  SKL16  [DO214AC]  48.64,145.8 180 top
D43  SR1100  [DO34+SOD123]  31.94,138.75 0 top
D44  BAS316  [SOD323-W]  239.18,50.48 180 top
D45  BAT54S  [SOT23]  145.65,74.74 90 top
D46  SKL16  [DO214AC]  154.6,78.17 0 top
D47  SKL16  [SOD123]  3.81,83.93 0 top
EEZ_SIGNATURE  SIGNATURESMALL  [SIGNATURE_5MM]  29.58,50.59 270 top
EEZ_SIGNATURE1  SIGNATURESMALL  [SIGNATURE_5MM]  89.43,183.34 180 top
EEZ_SIGNATURE2  SIGNATURESMALL  [SIGNATURE_5MM]  213.43,183.34 180 top
EEZ_SIGNATURE3  SIGNATURESMALL  [SIGNATURE_5MM]  131.18,178.69 180 top
EEZ_SIGNATURE4  SIGNATURESMALL  [SIGNATURE_5MM]  7.17,178.69 180 top
EEZ_SIGNATURE5  SIGNATURESMALL  [SIGNATURE_5MM]  76.56,91.51 180 top
FB  60R@100MHz  [BEAD0603]  69.87,147 270 top
FB1  60R@100MHz  [BEAD0603]  193.87,147 270 top
IC1  LM25575  [SOP65P640X110-17N_HOLE]  37.53,85.96 90 top
IC2  TLC5925  [SOP63P600X175-24N]  151.23,41.21 180 top
IC3  SN74LVCC3245ADBRSSOP  [SOP65P780X200-24N]  176.7,59.94 180 top
IC4  SN74LVCC3245ADBRSSOP  [SOP65P780X200-24N]  203.05,53.85 0 top
IC5  SN74LVCC3245ADBRSSOP  [SOP65P780X200-24N]  193.21,38.93 90 top
IC6  LD1117ADT33TR  [DPACK]  227.94,10.92 180 top
IC7  SN74LVCC3245ADBRSSOP  [SOP65P780X200-24N]  174.22,39.5 180 top
IC8  SN74LVCC3245ADBRSSOP  [SOP65P780X200-24N]  176.95,69.85 270 top
IC9  Si8660EC-B-IS1  [SOIC-16]  171.05,88.58 90 top
IC10  SN74LV125APW  [SOP65P640X120-14N]  189.91,69.91 90 top
IC11  SI8620EC-B-IS  [SOIC127P600X173-8N]  180.83,88.58 270 top
IC12  SI8620EC-B-IS  [SOIC127P600X173-8N]  206.23,88.58 270 top
IC13  Si8660EC-B-IS1  [SOIC-16]  196.7,88.58 90 top
IC14  PCA21125  [SOP65P640X120-14N]  239.12,56.01 270 top
IC15  AT25256B  [SOIC127P600X175-8N]  202.99,43.81 0 top
IC16  ENC28J60-I/SS  [SOP65P780X200-28N]  225.59,63.63 270 top
IC17  BC857BS  [SOT65P210X110-6N]  139.11,95.06 180 top
IC18  NE555D  [SOIC127P600X175-8N]  135.17,89.73 0 top
IC19  BC857BS  [SOT65P210X110-6N]  140.5,12.89 180 top
IC20  NE555D  [SOIC127P600X175-8N]  135.55,8.83 0 top
IC21  DAC8552  [DGK8-M]  109.18,136.91 180 top
IC22  ADS1120  [PW(R-PDSO-G16)]  98.96,137.04 90 top
IC23  MCP23S08-E/SO  [SOIC127P1030X265-18N]  96.42,124.65 180 top
IC24  LP339D  [SO14]  84.16,141.86 90 top
IC25  OP27GSZ  [SOIC127P600X173-8N]  88.42,169.74 90 top
IC26  TL072D  [SOIC127P600X173-8N]  89.31,154.62 0 top
IC27  TL072D  [SOIC127P600X173-8N]  102.64,174.06 90 top
IC28  REF5025  [SOIC127P600X175-8N]  116.67,146.37 0 top
IC29  DAC8552  [DGK8-M]  233.18,136.91 180 top
IC30  ADS1120  [PW(R-PDSO-G16)]  222.96,137.04 90 top
IC31  MCP23S08-E/SO  [SOIC127P1030X265-18N]  220.42,124.65 180 top
IC32  LP339D  [SO14]  208.16,141.86 90 top
IC33  OP27GSZ  [SOIC127P600X173-8N]  212.42,169.74 90 top
IC34  TL072D  [SOIC127P600X173-8N]  213.31,154.62 0 top
IC35  TL072D  [SOIC127P600X173-8N]  226.64,174.06 90 top
IC36  REF5025  [SOIC127P600X175-8N]  240.67,146.37 0 top
IC37  LP2951SO8  [SOIC127P600X175-8N]  174.04,129.73 180 top
IC38  LM337LZ  [TO92]  164.32,120.4 180 top
IC39  Si8610BC-B-IS  [SOIC127P600X173-8N]  130.1,125.42 90 top
IC40  LP2951SO8  [SOIC127P600X175-8N]  174.04,139.38 180 top
IC41  TLC555  [SOIC127P600X175-8N]  173.59,117.73 90 top
IC42  LM5574  [SOP65P640X110-16N]  148.51,117.8 0 top
IC43  LP2951SO8  [SOIC127P600X175-8N]  50.04,129.73 180 top
IC44  LM337LZ  [TO92]  40.32,120.4 180 top
IC45  Si8610BC-B-IS  [SOIC127P600X173-8N]  6.1,125.42 90 top
IC46  LP2951SO8  [SOIC127P600X175-8N]  50.04,139.38 180 top
IC47  TLC555  [SOIC127P600X175-8N]  49.59,117.73 90 top
IC48  LM5574  [SOP65P640X110-16N]  24.51,117.8 0 top
IC49  SN74LVCC3245ADBRSSOP  [SOP65P780X200-24N]  202.16,69.28 90 top
IC50  SN74LV1T34  [SOT95P280X145-5N]  152.44,71.56 0 top
IC51  UA78M12DCY  [SOT230P700X180-4N]  45.85,100.12 180 top
J1  BS-244DSM-R  [BP_5_12]  114.05,77 0 top
J2  BS-244DSM-B  [BP_5_12]  95,77 0 top
J3  BS-244DSM-R  [BP_5_12]  114.05,24 0 top
J4  BS-244DSM-G  [BP_5_12]  79,14 0 top
J5  BS-244DSM-B  [BP_5_12]  95,24 0 top
JP1  826926-2  [JP1]  172,25.02 270 top
JP2  826926-3  [JUMPER_3-PIN]  212.64,23.88 0 top
JP3  826926-2  [JP1]  240.83,43.43 180 top
JP4  0R-JUMPA  [A0R-JMP]  212.96,18.1 270 top
JP5  [JP4]  108.99,125.48 270 top
JP6  [JP4]  232.99,125.48 270 top
JP7  [JP1]  4.83,90.22 90 top
K_PAR  RT424005  [RT-C/016A5_ROUND]  93.9,49.15 90 top
K_S1  G6K-2F-5DC  [G6K-2F]  105.2,87.38 0 top
K_S2  G6K-2F-5DC  [G6K-2F]  126.79,34.61 180 top
K_SER  RT424005  [RT-C/016A5_ROUND]  131.23,53.53 180 top
KK1  SK 145/37,5  [SK145]  58.04,51.1 270 top
L1  100uH (MSS1260-104K)  [MSS1278]  25.53,87.04 0 top
L2  2u2  [L1210_COMBO]  161.27,134.24 180 top
L3  2u2  [L1210_COMBO]  164.07,139.83 90 top
L4  2u2  [L1210_COMBO]  139.75,117.92 0 top
L5  2u2  [L1210_COMBO]  37.27,134.24 180 top
L6  2u2  [L1210_COMBO]  40.07,139.83 90 top
L7  2u2  [L1210_COMBO]  15.75,117.92 0 top
L8  2u2  [L1210]  37.59,76.82 90 top
L9  60R@100MHz  [BEAD0603]  218.61,91.5 180 top
L10  60R@100MHz  [BEAD0603]  152.82,80.58 0 top
L11  470u  [DE0704]  4.83,55.86 180 top
LCD1  TFT_320QVT  [LCD_TFT_320QVT_MIRROR]  166.03,5.97 0 top
LED  HSMY-C170  [CHIPLED_0805]  169.66,124.78 180 top
LED1  HSMY-C170  [CHIPLED_0805]  45.66,124.78 180 top
LED_01_NEG  HSMF-C155  [LED_KPB-3025]  114.05,91 0 bottom
LED_01_POS  HSMF-C155  [LED_KPB-3025]  95,91 0 bottom
LED_CC1  HSMH-C170  [CHIPLED_0805]  154,74 180 bottom
LED_CC2  HSMH-C170  [CHIPLED_0805]  154,21 180 bottom
LED_CV1  L-934YD  [CHIPLED_0805]  154,84 180 bottom
LED_CV2  L-934YD  [CHIPLED_0805]  154,31 180 bottom
LED_O2+  HSMG-C170  [CHIPLED_0805]  114.05,38 180 bottom
LED_O2-  HSMG-C170  [CHIPLED_0805]  95,38 180 bottom
LED_PWR  HSMR-C170  [CHIPLED_0805]  154,101 180 bottom
LED_S1  HSMY-C170  [CHIPLED_0805]  129.25,84 180 bottom
LED_S2  HSMY-C170  [CHIPLED_0805]  129.25,31 180 bottom
MCU  [ARDUINO+ICSP_MIRROR]  257.09,80.2 180 top
OK1  MOC3052  [DIL6-SMD]  62.93,79.55 180 top
OK2  MOC3062  [DIL6-SMD]  53.02,79.55 180 top
OK3  HCPL-181  [HCPL-181]  147.93,89.66 270 top
OK4  HCPL-181  [HCPL-181]  148.5,10.54 270 top
P1  500K  [R_TRIM+R0805]  178.23,177.93 180 top
P2  500K  [R_TRIM+R0805]  54.23,177.93 180 top
Q1  BTA26-600  [TOP3S-1]  54.93,51.04 270 top
Q2  BTA26-600  [TOP3S-1]  57.97,51.04 90 top
Q3  IRLML2246TRPBF  [SOT95P237X112-3N]  135.04,44.7 180 top
Q4  2N7002  [SOT103P240X110-3N]  111.74,36.96 270 top
Q5  IRLML2246TRPBF  [SOT95P237X112-3N]  106.59,37.02 270 top
Q6  IRLML2246TRPBF  [SOT95P237X112-3N]  104.63,95.25 180 top
Q7  IRLML2246TRPBF  [SOT95P237X112-3N]  136,35.05 180 top
Q8  2N7002  [SOT103P240X110-3N]  231.82,73.98 0 top
Q9  IRLML2246TRPBF  [SOT95P237X112-3N]  164.89,12.45 180 top
Q10  2N7002  [SOT103P240X110-3N]  234.55,33.46 0 top
Q11  2N7002  [SOT103P240X110-3N]  234.55,37.85 0 top
Q12  2N7002  [SOT103P240X110-3N]  159.17,85.22 180 top
Q13  2N7002  [SOT103P240X110-3N]  159.24,90.11 180 top
Q14  IRFP250N  [TO247BV]  78,206 0 top
Q15  BCP56-16.115  [SOT230P700X180-4N]  70.57,193.74 180 top
Q16  MMBT5551  [SOT23-BEC]  70,177.29 0 top
Q17  BC846C  [SOT23-BEC]  86.77,198.19 180 top
Q18  BCP56-16.115  [SOT230P700X180-4N]  110.07,191.39 0 top
Q19  MMBT5401  [SOT23-BEC]  78.76,186.12 270 top
Q20  MMBT5401  [SOT23-BEC]  78.76,181.74 270 top
Q21  MMBT5551  [SOT23-BEC]  94.13,189.11 270 top
Q22  BC857C  [SOT23-BEC]  96.48,197.55 90 top
Q23  2N7002  [SOT103P240X110-3N]  80.8,134.88 180 top
Q24  2N7002  [SOT103P240X110-3N]  86.26,134.88 180 top
Q25  2N7002  [SOT103P240X110-3N]  74.51,123.19 270 top
Q26  BSS84P  [SOT95P237X112-3N]  74.51,118.94 90 top
Q27  IRF9640  [TO220B-VMOS]  99,206 0 top
Q28  IRFP250N  [TO247BV]  202,206 0 top
Q29  BCP56-16.115  [SOT230P700X180-4N]  194.57,193.74 180 top
Q30  MMBT5551  [SOT23-BEC]  194,177.29 0 top
Q31  BC846C  [SOT23-BEC]  210.76,198.19 180 top
Q32  BCP56-16.115  [SOT230P700X180-4N]  234.07,191.39 0 top
Q33  MMBT5401  [SOT23-BEC]  202.76,186.12 270 top
Q34  MMBT5401  [SOT23-BEC]  202.76,181.74 270 top
Q35  MMBT5551  [SOT23-BEC]  218.13,189.11 270 top
Q36  BC857C  [SOT23-BEC]  220.48,197.55 90 top
Q37  2N7002  [SOT103P240X110-3N]  204.8,134.88 180 top
Q38  2N7002  [SOT103P240X110-3N]  210.26,134.88 180 top
Q39  2N7002  [SOT103P240X110-3N]  198.51,123.19 270 top
Q40  BSS84P  [SOT95P237X112-3N]  198.51,118.94 90 top
Q41  IRF9640  [TO220B-VMOS]  223,206 0 top
Q42  MMBT5401  [SOT23-BEC]  171.05,181.93 90 top
Q43  BCP56-16.115  [SOT230P700X180-4N]  177.4,189.23 0 top
Q44  MCR08MT1G  [SOT230P700X180-4N]  157.59,192.28 0 top
Q45  IRF5210PBF  [TO220B-VMOS]  175,206 0 top
Q46  IRF5210PBF  [TO220B-VMOS]  163,206 0 top
Q47  MMBT5401  [SOT23-BEC]  47.05,181.93 90 top
Q48  BCP56-16.115  [SOT230P700X180-4N]  53.4,189.23 0 top
Q49  MCR08MT1G  [SOT230P700X180-4N]  33.59,192.28 0 top
Q50  IRF5210PBF  [TO220B-VMOS]  51,206 0 top
Q51  IRF5210PBF  [TO220B-VMOS]  39,206 0 top
Q52  2N7002  [SOT103P240X110-3N]  160.76,16.7 180 top
Q53  2N7002  [SOT103P240X110-3N]  160.76,22.86 180 top
Q54  IRLL014N  [SOT223]  6.09,75.29 180 top
R1  150R/2W  [R2512]  55.82,31.42 270 top
R2  15R/7W  [R_0913]  60.07,19.67 0 top
R3  330R/2W  [R2512]  63.18,69.77 0 top
R4  270R  [R0805]  61.47,86.34 180 top
R5  330R/2W  [R2512]  53.85,69.77 180 top
R6  270R  [R0805]  56.64,86.34 0 top
R7  15K  [R0805]  33.53,76.75 0 top
R8  2K2  [R0805]  33.53,74.79 180 top
R9  10R  [R1206]  36.51,95.49 180 top
R10  5K6 1%  [R0805]  43.62,82.15 270 top
R11  30K  [R0805]  43.62,87.04 90 top
R12  20K  [R0805]  41.66,76.18 90 top
R13  1K8 1%  [R0805]  41.66,82.15 90 top
R14  1K5  [R0805]  154.16,34.74 90 top
R15  100K  [R0805]  106.66,40.26 180 top
R16  4K7  [R0805]  138.6,44.7 90 top
R17  100K  [R0805]  111.8,40.22 0 top
R18  4K7  [R0805]  108.75,95.12 90 top
R19  4K7  [R0805]  139.23,35.05 90 top
R20  560R  [R0805]  242.99,49.53 90 top
R21  2K2 1%  [R0805]  220.13,70.17 90 top
R22  10K  [R0805]  239.56,48.26 180 top
R23  4K7  [R0805]  173.84,12.13 270 top
R24  100K  [R0805]  228.51,73.91 90 top
R25  10R  [R0805]  167.56,3.68 0 top
R26  10K  [R0805]  202.54,3.62 0 top
R27  1K5  [R0805]  140.95,8.83 270 top
R28  100K  [R0805]  168,12.45 90 top
R29  240R  [R0805]  155.81,89.53 270 top
R30  240R  [R0805]  155.81,84.52 90 top
R31  100K  [R0805]  231.12,37.91 270 top
R32  1K5  [R0805]  140.57,89.79 270 top
R33  240R  [R0805]  157.14,18.1 270 top
R34  240R  [R0805]  157.08,24.07 90 top
R35  100K  [R0805]  231.12,33.46 270 top
R36  2K2  [R0805]  101.48,167.63 90 top
R37  2K  [R0805]  108.29,159.32 0 top
R38  2K  [R0805]  108.29,150.37 180 top
R39  2K2  [R0805]  94.77,172.16 270 top
R40  10K  [R0805]  95.08,150.31 90 top
R41  10K  [R0805]  95.08,159.44 90 top
R42  10K  [R0805]  104.16,161.86 180 top
R43  10K  [R0805]  104.16,155.02 180 top
R44  220R  [R0805]  99.15,150.37 180 top
R45  11K  [R0805]  98.83,171.58 270 top
R46  10K  [R0805]  106.89,171.96 90 top
R47  220R  [R0805]  99.59,161.86 180 top
R48  470R  [R0805]  97.43,189.17 90 top
R49  100R  [R0805]  80.8,189.11 0 top
R50  2K2  [R0805]  81.3,198.5 0 top
R51  470R  [R0805]  80.8,191.2 180 top
R52  16K  [R0805]  90.7,189.17 90 top
R53  5K1  [R0805]  85.94,129.48 180 top
R54  560R  [R0805]  88.48,189.17 270 top
R55  5K6  [R0805]  85.94,131.64 0 top
R56  2K2  [R0805]  76.41,141.35 90 top
R57  240R  [R0805]  73.3,134.75 180 top
R58  240R  [R0805]  73.3,132.59 0 top
R59  2R2/2W  [0411V]  107.59,200.92 270 top
R60  5K1  [R0805]  81.24,129.48 180 top
R61  12K  [R0805]  74.26,145.29 270 top
R62  5K6  [R0805]  81.24,131.64 0 top
R63  2K2  [R0805]  103.15,196.79 180 top
R64  10R  [R0805]  101.88,143.83 270 top
R65  2K2  [R0805]  103.15,199.33 180 top
R66  220R  [R0805]  103.97,189.17 270 top
R67  1K  [R0805]  101.88,189.17 270 top
R68  1R  [R0805]  110.96,185.99 0 top
R69  47K  [R0805]  74.26,141.35 270 top
R70  10K  [R0805]  82.7,150.62 0 top
R71  10K  [R0805]  94.77,167.01 270 top
R72  100K  [R0805]  74.76,126.05 0 top
R73  10K  [R0805]  99.72,189.17 270 top
R74  220R  [R0805]  75.02,182.06 90 top
R75  220R  [R0805]  75.02,186.12 90 top
R76  1K8  [R0805]  73.94,177.61 180 top
R77  51K  [R0805]  86.26,189.17 270 top
R78  100K  [R0805]  74.57,116.02 180 top
R79  240R  [R0805]  78.83,120.21 180 top
R80  240R  [R0805]  78.83,117.99 180 top
R81  1K  [R0805]  90.77,198.88 0 top
R82  7K5  [R0805]  99.15,157.16 0 top
R83  130K  [R0805]  104.16,157.16 0 top
R84  130K  [R0805]  99.15,152.53 0 top
R85  20K  [R0805]  108.29,157.16 0 top
R86  20K  [R0805]  108.29,152.53 0 top
R87  7K5  [R0805]  95.08,155.51 270 top
R88  3K9  [R0805]  83.08,173.61 0 top
R89  51R  [R0805]  79.15,171.58 0 top
R90  51R  [R0805]  79.15,169.48 0 top
R91  3K9  [R0805]  92.16,172.15 90 top
R92  0R1/3W  [0411V]  88.92,203.08 180 top
R93  R020/2W  [R2512]  74.19,170.31 270 top
R94  51R  [R0805]  83.08,171.58 0 top
R95  51R  [R0805]  83.08,169.48 0 top
R96  180R  [R0805]  92.16,168.21 90 top
R97  180R  [R0805]  83.08,175.64 180 top
R98  10K  [R0805]  76.41,145.29 90 top
R99  0R  [R0805]  82.89,156.53 0 top
R100  2K2  [R0805]  218.77,172.16 270 top
R101  2K2  [R0805]  225.48,167.63 90 top
R102  2K  [R0805]  232.29,159.32 0 top
R103  2K  [R0805]  232.29,150.37 180 top
R104  10K  [R0805]  219.08,150.31 90 top
R105  10K  [R0805]  219.08,159.44 90 top
R106  10R  [R0805]  225.88,143.83 270 top
R107  12K  [R0805]  198.26,145.29 270 top
R108  2K2  [R0805]  200.41,141.35 90 top
R109  5K6  [R0805]  209.94,131.64 0 top
R110  5K6  [R0805]  205.24,131.64 0 top
R111  5K1  [R0805]  209.94,129.48 180 top
R112  5K1  [R0805]  205.24,129.48 180 top
R113  240R  [R0805]  197.3,134.75 180 top
R114  10K  [R0805]  228.16,161.86 180 top
R115  10K  [R0805]  228.16,155.02 180 top
R116  11K  [R0805]  222.83,171.58 270 top
R117  240R  [R0805]  197.3,132.59 0 top
R118  10K  [R0805]  230.89,171.96 90 top
R119  220R  [R0805]  223.15,150.37 180 top
R120  220R  [R0805]  223.59,161.86 180 top
R121  470R  [R0805]  221.43,189.17 90 top
R122  100R  [R0805]  204.8,189.11 0 top
R123  2K2  [R0805]  205.3,198.5 0 top
R124  470R  [R0805]  204.8,191.2 180 top
R125  16K  [R0805]  214.7,189.17 90 top
R126  560R  [R0805]  212.48,189.17 270 top
R127  2R2/2W  [0411V]  231.59,200.92 270 top
R128  2K2  [R0805]  227.15,196.79 180 top
R129  2K2  [R0805]  227.15,199.33 180 top
R130  220R  [R0805]  227.97,189.17 270 top
R131  1K  [R0805]  225.88,189.17 270 top
R132  1R  [R0805]  234.96,185.99 0 top
R133  47K  [R0805]  198.26,141.35 270 top
R134  10K  [R0805]  206.7,150.62 0 top
R135  10K  [R0805]  218.77,167.01 270 top
R136  100K  [R0805]  198.76,126.05 0 top
R137  10K  [R0805]  223.72,189.17 270 top
R138  220R  [R0805]  199.02,182.06 90 top
R139  220R  [R0805]  199.02,186.12 90 top
R140  1K8  [R0805]  197.94,177.61 180 top
R141  51K  [R0805]  210.26,189.17 270 top
R142  100K  [R0805]  198.57,116.02 180 top
R143  240R  [R0805]  202.83,120.21 180 top
R144  240R  [R0805]  202.83,117.99 180 top
R145  1K  [R0805]  214.77,198.88 0 top
R146  7K5  [R0805]  223.15,157.16 0 top
R147  130K  [R0805]  228.16,157.16 0 top
R148  130K  [R0805]  223.15,152.53 0 top
R149  20K  [R0805]  232.29,157.16 0 top
R150  20K  [R0805]  232.29,152.53 0 top
R151  7K5  [R0805]  219.08,155.51 270 top
R152  3K9  [R0805]  207.08,173.61 0 top
R153  51R  [R0805]  203.15,171.58 0 top
R154  51R  [R0805]  203.15,169.48 0 top
R155  3K9  [R0805]  216.16,172.15 90 top
R156  0R1/3W  [0411V]  212.92,203.08 180 top
R157  R020/2W  [R2512]  198.19,170.31 270 top
R158  51R  [R0805]  207.08,171.58 0 top
R159  51R  [R0805]  207.08,169.48 0 top
R160  180R  [R0805]  216.16,168.21 90 top
R161  180R  [R0805]  207.08,175.64 180 top
R162  10K  [R0805]  200.41,145.29 90 top
R163  0R  [R0805]  206.89,156.53 0 top
R164  82K  [R0805]  171.24,177.87 270 top
R165  39K  [R0805]  174.42,182.56 90 top
R166  604R 1%  [R0805]  169.4,116.14 270 top
R167  12K 1%  [R0805]  178.36,125.86 180 top
R168  3K9 1%  [R0805]  174.67,125.86 180 top
R169  10K  [R0805]  171.12,143.7 180 top
R170  200R 1%  [R0805]  167.37,116.14 90 top
R171  4K7  [R0805]  166.8,189.11 90 top
R172  4K7  [R0805]  164.77,189.11 270 top
R173  3K3  [R0805]  150.1,193.3 0 top
R174  10K  [R0805]  150.03,191.07 180 top
R175  100R  [R0805]  171.5,185.68 270 top
R176  100R  [R0805]  171.5,193.68 270 top
R177  1K5  [R0805]  166.74,193.68 270 top
R178  100R  [R0805]  164.7,193.68 270 top
R179  18K  [R0805]  169.02,185.68 90 top
R180  18K  [R0805]  129.91,153.04 180 top
R181  560R  [R0805]  169.78,120.84 270 top
R182  12K 1%  [R0805]  174.48,135.51 180 top
R183  3K9 1%  [R0805]  174.48,133.54 0 top
R184  3K9  [R0805]  178.36,123.07 0 top
R185  30K  [R0805]  149.65,111.51 0 top
R186  20K  [R0805]  138.92,113.6 0 top
R187  30K 1%  [R0805]  144.76,111.51 180 top
R188  4K7 1%  [R0805]  144.76,113.6 0 top
R189  39K  [R0805]  138.48,121.61 270 top
R190  1K5  [R0805]  138.48,125.67 270 top
R191  10R  [R1210]  158.99,118.68 90 top
R192  82K  [R0805]  47.24,177.87 270 top
R193  39K  [R0805]  50.42,182.56 90 top
R194  604R 1%  [R0805]  45.4,116.14 270 top
R195  12K 1%  [R0805]  54.36,125.86 180 top
R196  3K9 1%  [R0805]  50.67,125.86 180 top
R197  10K  [R0805]  47.12,143.7 180 top
R198  200R 1%  [R0805]  43.37,116.14 90 top
R199  4K7  [R0805]  42.8,189.11 90 top
R200  4K7  [R0805]  40.77,189.11 270 top
R201  3K3  [R0805]  26.1,193.3 0 top
R202  10K  [R0805]  26.04,191.07 180 top
R203  100R  [R0805]  47.5,185.68 270 top
R204  100R  [R0805]  47.5,193.68 270 top
R205  1K5  [R0805]  42.74,193.68 270 top
R206  100R  [R0805]  40.7,193.68 270 top
R207  18K  [R0805]  45.02,185.68 90 top
R208  18K  [R0805]  5.91,153.04 180 top
R209  560R  [R0805]  45.78,120.84 270 top
R210  12K 1%  [R0805]  50.48,135.51 180 top
R211  3K9 1%  [R0805]  50.48,133.54 0 top
R212  3K9  [R0805]  54.36,123.07 0 top
R213  30K  [R0805]  25.65,111.51 0 top
R214  20K  [R0805]  14.92,113.6 0 top
R215  30K 1%  [R0805]  20.76,111.51 180 top
R216  4K7 1%  [R0805]  20.76,113.6 0 top
R217  39K  [R0805]  14.48,121.61 270 top
R218  1K5  [R0805]  14.48,125.67 270 top
R219  10R  [R1210]  34.99,118.68 90 top
R220  49R9  [R0805]  225.02,91.19 90 top
R221  49R9  [R0805]  225.02,87.06 90 top
R222  49R9  [R0805]  225.02,96.71 270 top
R223  49R9  [R0805]  225.02,100.71 90 top
R224  200R  [R0805]  239.75,81.92 0 top
R225  200R  [R0805]  234.67,81.92 180 top
R226  120R 1%  [R0805]  220.13,74.1 90 top
R227  1R  [R0805]  117.39,67.94 90 top
R228  1R  [R0805]  109.33,59.88 0 top
R229  100K  [R0805]  162.41,84.96 90 top
R230  100K  [R0805]  162.41,90.49 90 top
R231  100K  [R0805]  160.89,19.62 180 top
R232  100K  [R0805]  160.89,25.53 180 top
R233  10K  [R1206]  143.04,71.56 0 top
R234  1K  [R0805]  148,71.56 180 top
R235  1K  [R0805]  153.65,66.29 90 top
R236  100R  [R0805]  149.27,78.17 0 top
R237  1K5  [R0805]  148,67.88 180 top
R238  180R  [R0805]  142.54,89.79 90 top
R239  1K5  [R0805]  153.97,10.54 90 top
R240  180R  [R0805]  142.92,8.83 90 top
R241  47K  [R0805]  11.37,84.95 90 top
R242  1K  [R0805]  9.4,84.95 90 top
R243  100R  [R0805]  9.78,89.2 90 top
R244  5K6  [R0805]  8.19,95.3 180 top
R245  10K  [R0805]  8.19,93.33 0 top
SAR1  CG2-470L  [SAR]  29.53,20.39 0 top
SG1  LD-BZEN-0903  [BUZZER]  218.42,85.47 180 top
SH1  GND  [SHORT]  64.67,165.04 0 top
SH2  GND  [SHORT]  188.67,165.04 0 top
SH3  [SHORT_2]  152.51,165.1 0 top
SH4  [SHORT_2]  28.51,165.1 0 top
SW1  1301.9316  [TACTM-6XN]  232,22 90 bottom
TP1  [PCB_SHIELD_TAB]  236.2,47.75 0 top
TR1  MSD1260-824  [MSD1260]  149.59,130.69 270 top
TR2  MSD1260-824  [MSD1260]  25.59,130.69 270 top
TR3  TEZ6/D230/15V  [PCB_TRAFO6VA_TEZ+VPP]  29.97,50.09 0 top
U$1  [RECYCLE_BIN1/8]  1.02,27.54 0 top
U$2  [RECYCLE_BIN1/8]  127.87,97.09 0 top
U$3  [PB_SMALL]  124.76,100.08 0 top
U$4  [ESD_SYMBOL]  115.77,96.44 0 top
U$5  [PB_SMALL]  7.88,30.78 0 top
U$6  [ESD_SYMBOL]  57.49,96.79 90 top
VAR1  ***  [VARISTOR]  18.86,19.29 180 top
VAR2  ***  [VARISTOR]  18.86,24.43 0 top
X1  282836-5  [TBLOCK5.0_5]  11.3,9.57 90 top
X2  22-23-2031  [22-23-2031]  4.25,45.89 90 top
X3  22-23-2031  [22-23-2031]  18.41,76.82 270 top
X4  MC000005  [MC000005_MIRROR]  137.96,78.42 0 top
X5  MC000005  [MC000005_MIRROR]  137.96,25.46 0 top
X6  09185106324  [IDC-10PIN]  175.18,99.57 0 top
X7  09185106324  [IDC-10PIN]  200.57,99.57 0 top
X8  22-23-2021  [22-23-2021]  168.32,19.18 0 top
X9  282836-4  [TBLOCK5.0_4]  76.75,74.87 0 top
X10  22-23-2021  [22-23-2021]  125.01,90.93 90 top
X11  22-23-2021  [22-23-2021]  125.01,8.83 90 top
X12  282836-4  [TBLOCK5.0_4]  76.75,50.48 0 top
X13  09185106324  [PAK100/2500-10]  101.62,112.21 0 top
X14  282836-4  [TBLOCK5.0_4]  117.05,174.31 0 top
X15  TSW-104-08-L-D  [TSW-104-02-S-D]  117.05,129.16 270 top
X16  22-23-2041  [22-23-2041]  75.53,111.25 0 top
X17  22-23-2031  [22-23-2031]  84.42,111.25 0 top
X18  22-23-2031  [22-23-2031]  66.25,138.12 270 top
X19  22-23-2021  [22-23-2021]  117.75,119.57 90 top
X20  TSW-109-08-L-D-RA  [TSW-109-08-L-D-RA]  63.14,159.96 270 top
X21  09185106324  [PAK100/2500-10]  225.62,112.21 0 top
X22  282836-4  [TBLOCK5.0_4]  241.05,174.31 0 top
X23  TSW-104-08-L-D  [TSW-104-02-S-D]  241.05,129.16 270 top
X24  22-23-2041  [22-23-2041]  199.53,111.25 0 top
X25  22-23-2031  [22-23-2031]  208.42,111.25 0 top
X26  22-23-2031  [22-23-2031]  190.25,138.12 270 top
X27  22-23-2021  [22-23-2021]  241.75,119.57 90 top
X28  TSW-109-08-L-D-RA  [TSW-109-08-L-D-RA]  187.14,159.96 270 top
X29  AC In  [TBLOCK5.0_2]  129,184.99 180 top
X30  22-23-2031  [22-23-2031]  128.89,133.03 0 top
X31  22-23-2031  [22-23-2031]  128.89,118.18 0 top
X32  22-23-2021  [22-23-2021]  179.88,118.3 90 top
X33  SSW-109-02-T-D-RA  [SSW-109-02-T-D-RA]  171.88,170.12 270 top
X34  AC In  [TBLOCK5.0_2]  5,184.99 180 top
X35  22-23-2031  [22-23-2031]  4.89,133.03 0 top
X36  22-23-2031  [22-23-2031]  4.89,118.18 0 top
X37  22-23-2021  [22-23-2021]  55.88,118.3 90 top
X38  SSW-109-02-T-D-RA  [SSW-109-02-T-D-RA]  47.88,170.12 270 top
X39  LMJTAB881243M-L  [RJ45-TRAFO-LED]  237.85,92.58 90 top
X40  09185067324  [IDC-6PIN]  240.83,18.61 270 top
X41  09185067324  [IDC-6PIN]  18.89,99.79 180 top
Y1  32,768kHz  [R26_XTAL]  241.6,60.83 0 top
Y2  25MHz  [HC-49/4H]  226.67,55.5 180 top
ZD1  1.5KE400CA  [DO201-BIDIR]  50.06,17.54 90 top
ZD2  1.5KE400CA  [DO201-BIDIR]  44.21,17.54 90 top
ZD3  P4SMAJ60A  [DO214AC]  83.1,72.14 270 top
ZD4  P4SMAJ60A  [DO214AC]  83.1,62.48 270 top
ZD5  13V  [MINIMELF]  80.73,196.22 0 top
ZD6  6V2  [MINIMELF]  92.04,194.69 0 top
ZD7  P6SMB68A  [DO214AA]  116.86,179.71 180 top
ZD8  13V  [MINIMELF]  204.73,196.22 0 top
ZD9  6V2  [MINIMELF]  216.04,194.69 0 top
ZD10  P6SMB68A  [DO214AA]  240.86,179.71 180 top
ZD11  13V  [MINIMELF]  169.15,192.85 270 top
ZD12  5V6  [MINIMELF]  149.21,188.66 180 top
ZD13  13V  [MINIMELF]  45.15,192.85 270 top
ZD14  5V6  [MINIMELF]  25.21,188.66 180 top
ZD15  P4SMAJ60A  [DO214AC]  83.1,37.47 270 top
ZD16  P4SMAJ60A  [DO214AC]  83.1,48.26 270 top
ZD17  4V3  [MINIMELF]  150.28,75.76 0 top